# Allegro board CarteV1.brd
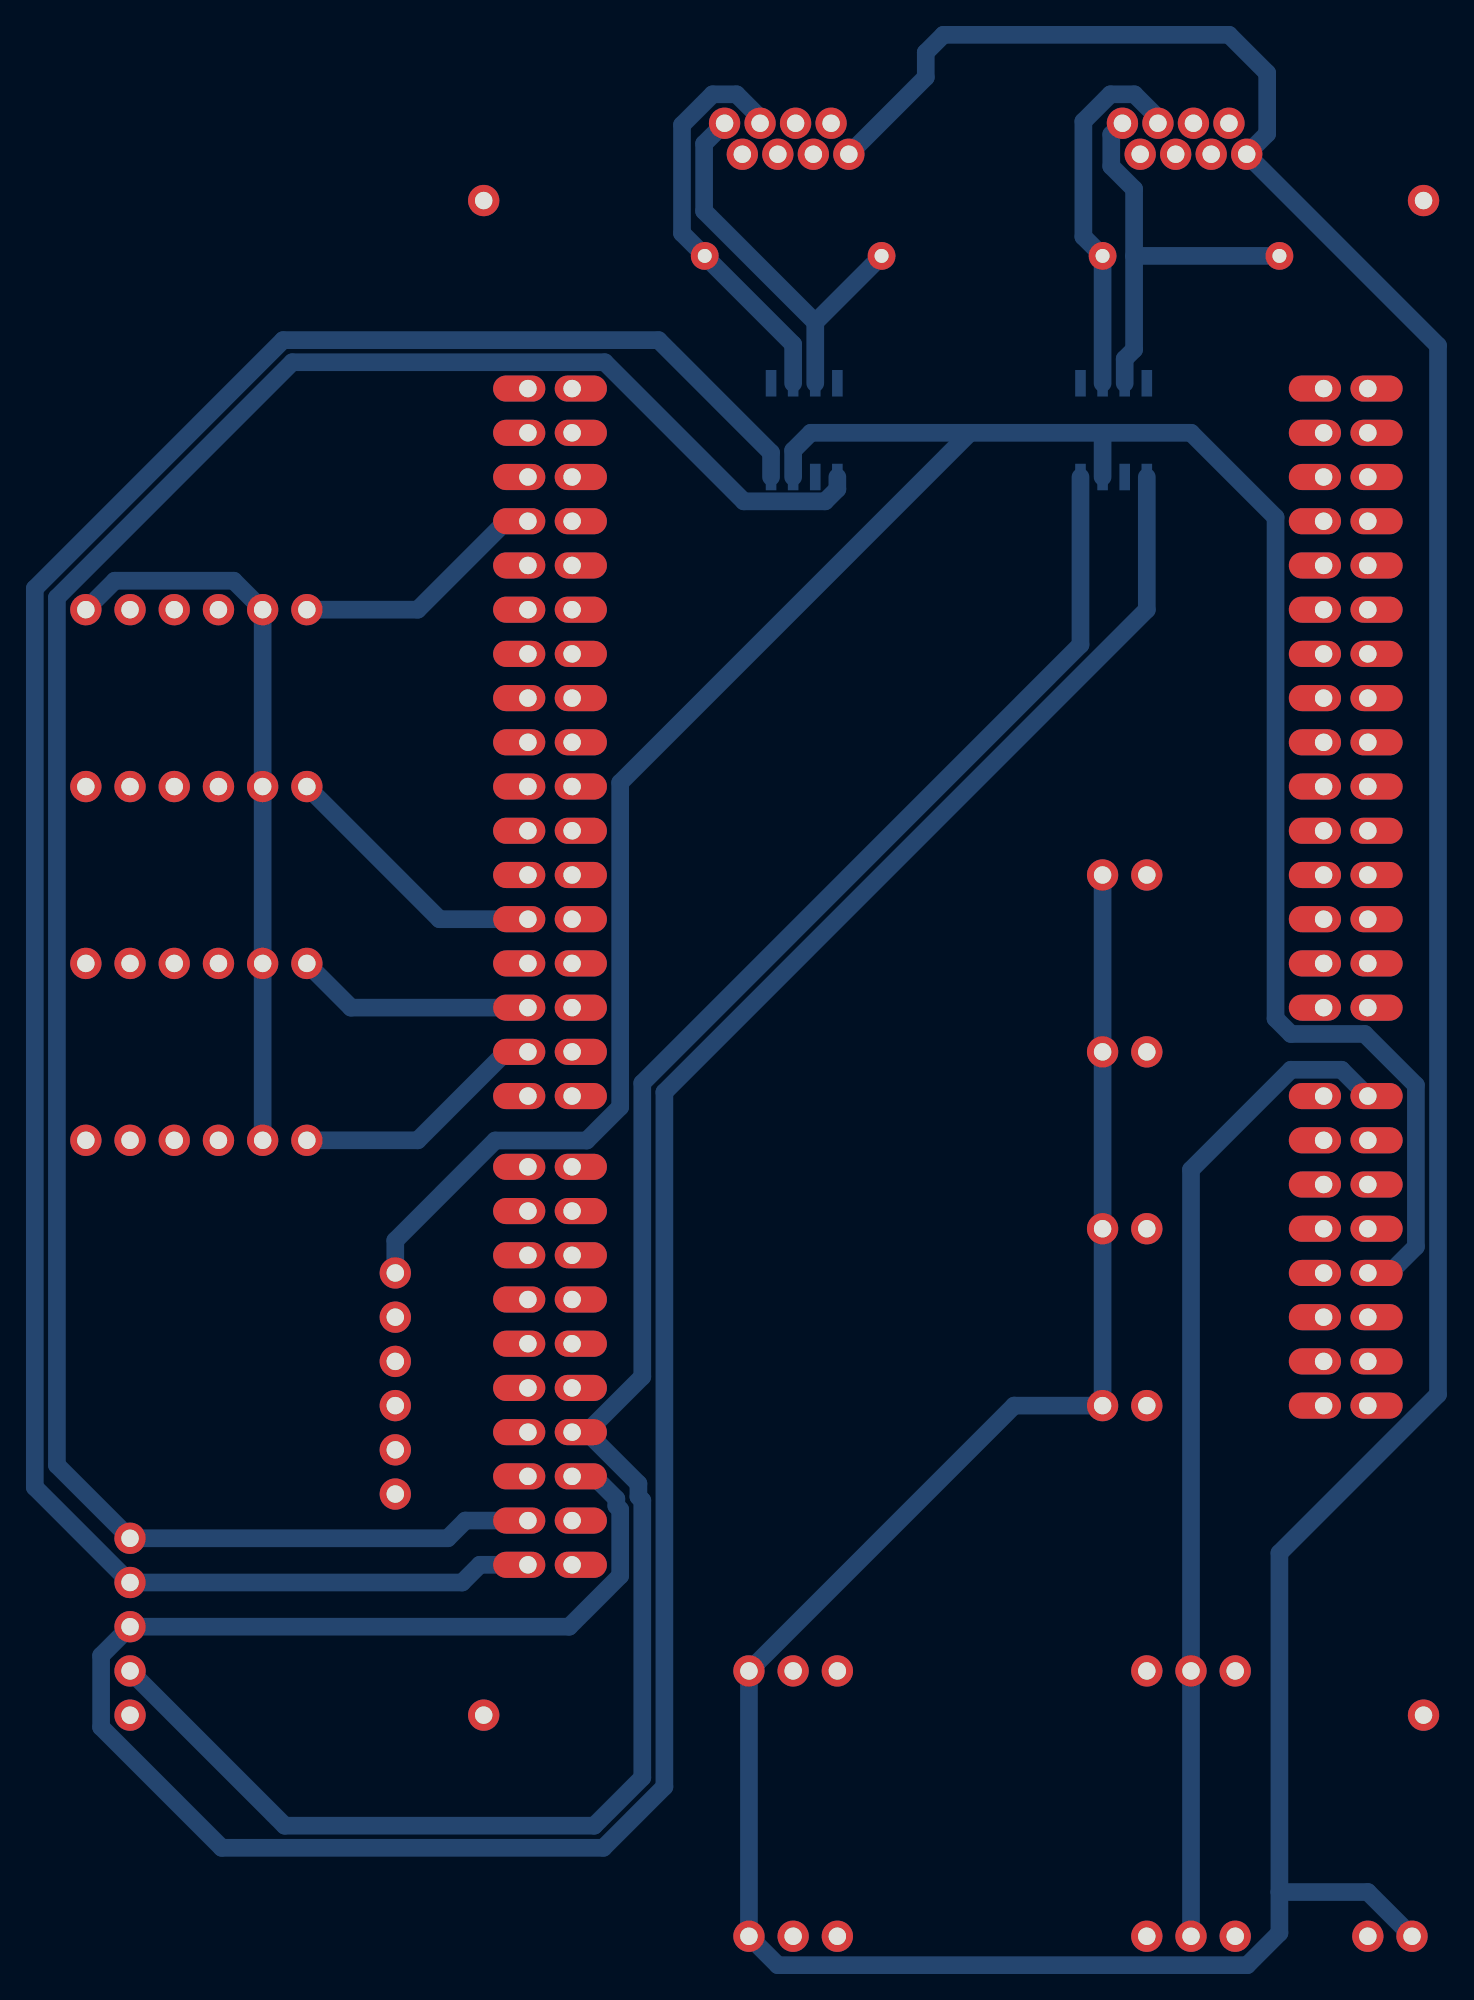
[diagram p0: board, top side]
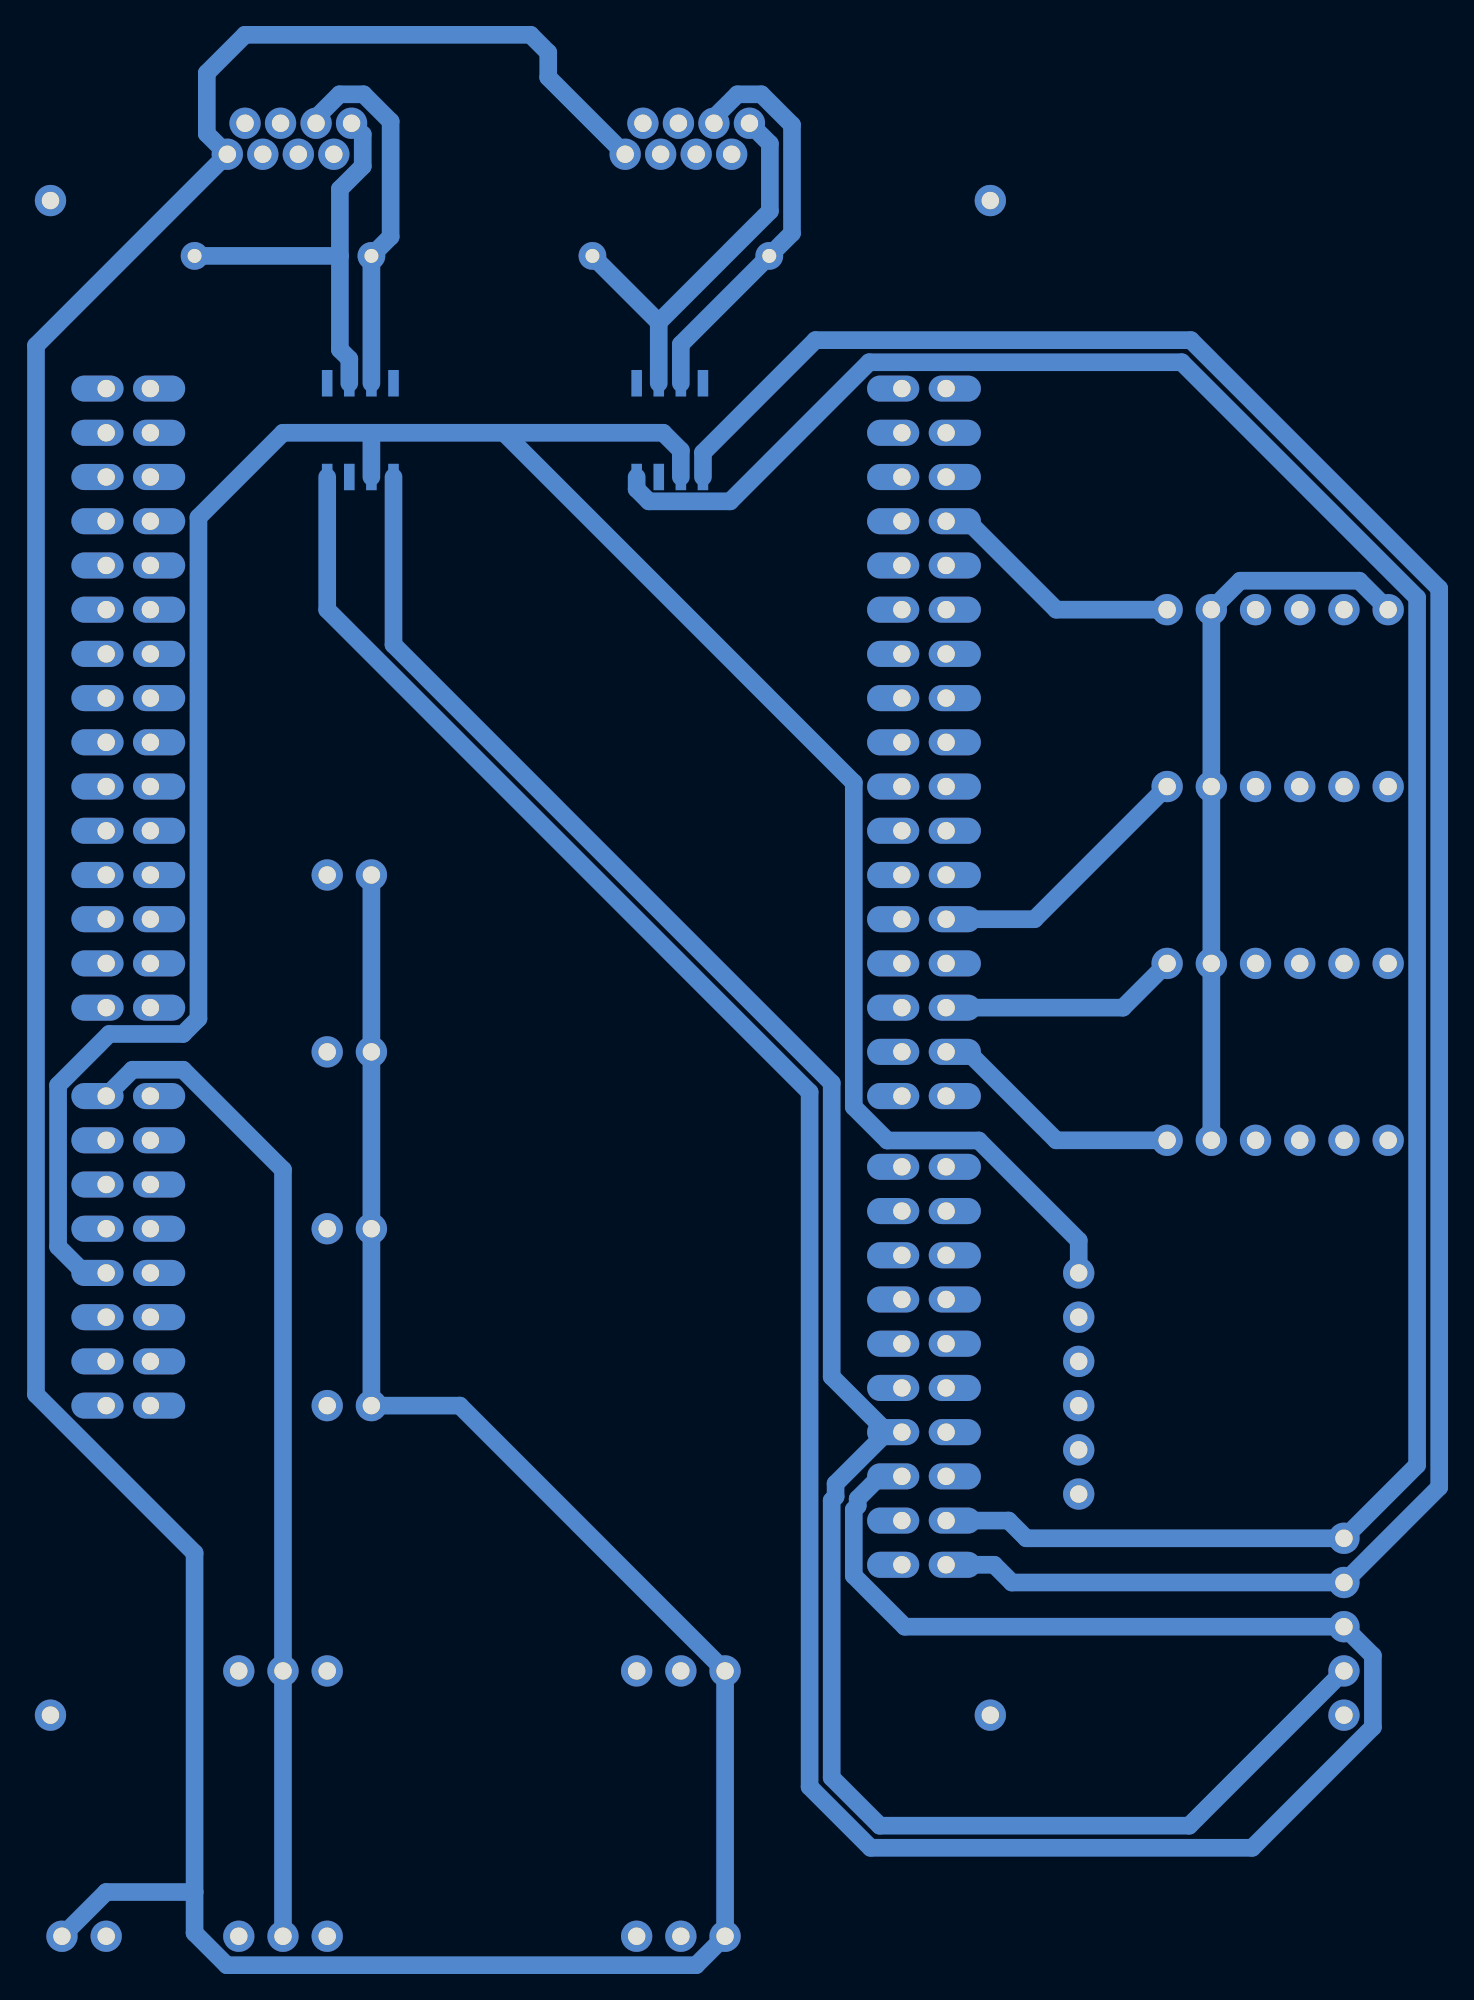
[diagram p1: board, bottom side, seen from below]

No outline. copper layers: TOP, BOTTOM. Coordinates in mm from the lowest, leftmost part position.

## Design rules (mm)
constraint set DEFAULT: min track width 1.016

## Placement (name value [footprint] x y rotation side)
J11  Sortie_1  [CONNECTEUR_2]  81.28 0 180 top
J12  Sortie_2  [CONNECTEUR_2]  48.26 30.48 0 top
J13  Sortie_3  [CONNECTEUR_2]  48.26 40.64 0 top
J14  Sortie_4  [CONNECTEUR_2]  48.26 60.96 0 top
J15  Entree_24V  [CONNECTEUR_2]  48.26 50.8 0 top
J17  Nappe_1  [CONNECTEUR_6]  15.24 45.72 180 top
J18  Nappe_2  [CONNECTEUR_6]  15.24 55.88 180 top
J19  Nappe_3  [CONNECTEUR_6]  15.24 66.04 180 top
J20  Nappe_4  [CONNECTEUR_6]  15.24 76.2 180 top
J23  Lect_Interm_RxTx  [CONNECTEUR_5]  0 7.62 90 top
J24  Potar  [CONNECTEUR_6]  15.24 20.32 90 top
R3  120  [RES_01]  33.02 96.52 0 top
R4  120  [RES_01]  55.88 96.52 0 top
U5  sn69hvd232d  [SN65HVD232D]  40.64 83.82 90 bottom
U6  sn69hvd232d  [SN65HVD232D]  58.42 83.82 90 bottom
U7  nucleo_144_shield  [NUCLEO_144_SHIELD]  71.12 88.9 180 top
U8  Conv_TEL_3-2411  [CONV_TRACO]  43.18 30.48 90 top
U9  RJ-45  [RJ45]  2.54 104.14 0 top
U10  RJ-45  [RJ45]  25.4 104.14 0 top
U11  Trou_Drivers  [TROU_DRIVERS]  20.32 12.7 90 top

## Library data of the parts
J11-J15 = CON2
J17-J20 J24 = CON6
J23 = CON5
R3 R4 = R
U5 U6 = sn69hvd232d
U7 = nucleo_144_shield
U8 = Conv_TEL_3-2411
U9 U10 = RJ-45
U11 = Trou_Drivers

## Footprints (pads in the part's own frame, mm; a bottom-side part is the same pattern mirrored in y, then rotated)
CONNECTEUR_2
  round 1.8 hole 1: 1(7.62,0) 2(10.16,0)
CONNECTEUR_5
  round 1.8 hole 1: 1(5.08,0) 2(7.62,0) 3(10.16,0) 4(12.7,0) 5(15.24,0)
CONNECTEUR_6
  round 1.8 hole 1: 1(5.08,0) 2(7.62,0) 3(10.16,0) 4(12.7,0) 5(15.24,0) 6(17.78,0)
CONV_TRACO
  round 1.8 hole 1: 1(-30.48,7.62) 2(-30.48,5.08) 3(-30.48,2.54) 4(-15.24,7.62) 5(-15.24,5.08) 6(-15.24,2.54) 7(-30.48,-15.24) 8(-30.48,-17.78) 9(-30.48,-20.32) 10(-15.24,-15.24) 11(-15.24,-17.78) 12(-15.24,-20.32)
NUCLEO_144_SHIELD
  oval 3x1.5 hole 1: 1(0,58.42) 2(2.54,58.42) 3(0,55.88) 4(2.54,55.88) 5(0,53.34) 6(2.54,53.34) 7(0,50.8) 8(2.54,50.8) 9(0,48.26) 10(2.54,48.26) 11(0,45.72) 12(2.54,45.72) 13(0,43.18) 14(2.54,43.18) 15(0,40.64) 16(2.54,40.64) 17(0,35.56) 18(2.54,35.56) 19(0,33.02) 20(2.54,33.02) 21(0,30.48) 22(2.54,30.48) 23(0,27.94) 24(2.54,27.94) 25(0,25.4) 26(2.54,25.4) 27(0,22.86) 28(2.54,22.86) 29(0,20.32) 30(2.54,20.32) 31(0,17.78) 32(2.54,17.78) 33(0,15.24) 34(2.54,15.24) 35(0,12.7) 36(2.54,12.7) 37(0,10.16) 38(2.54,10.16) 39(0,7.62) 40(2.54,7.62) 41(0,5.08) 42(2.54,5.08) 43(0,2.54) 44(2.54,2.54) 45(0,0) 46(2.54,0) 47(45.72,67.564) 48(48.26,67.564) 49(45.72,65.024) 50(48.26,65.024) 51(45.72,62.484) 52(48.26,62.484) 53(45.72,59.944) 54(48.26,59.944) 55(45.72,57.404) 56(48.26,57.404) 57(45.72,54.864) 58(48.26,54.864) 59(45.72,52.324) 60(48.26,52.324) 61(45.72,49.784) 62(48.26,49.784) 63(45.72,47.244) 64(48.26,47.244) 65(45.72,44.704) 66(48.26,44.704) 67(45.72,40.64) 68(48.26,40.64) 69(45.72,38.1) 70(48.26,38.1) 71(45.72,35.56) 72(48.26,35.56) 73(45.72,33.02) 74(48.26,33.02) 75(45.72,30.48) 76(48.26,30.48) 77(45.72,27.94) 78(48.26,27.94) 79(45.72,25.4) 80(48.26,25.4) 81(45.72,22.86) 82(48.26,22.86) 83(45.72,20.32) 84(48.26,20.32) 85(45.72,17.78) 86(48.26,17.78) 87(45.72,15.24) 88(48.26,15.24) 89(45.72,12.7) 90(48.26,12.7) 91(45.72,10.16) 92(48.26,10.16) 93(45.72,7.62) 94(48.26,7.62) 95(45.72,5.08) 96(48.26,5.08) 97(45.72,2.54) 98(48.26,2.54) 99(45.72,0) 100(48.26,0)
RES_01
  round 1.6 hole 0.8: 1(0,0) 2(10.16,0)
RJ45
  round 1.8 hole 1: 1(31.62,0) 2(33.66,0) 3(35.7,0) 4(37.74,0) 5(32.64,-1.78) 6(34.68,-1.78) 7(36.72,-1.78) 8(38.76,-1.78)
SN65HVD232D
  rect 1.524x0.61 smd: 1(0,0) 2(0,-1.27) 3(0,-2.54) 4(0,-3.81) 5(5.385,-3.81) 6(5.385,-2.54) 7(5.385,-1.27) 8(5.385,0)
TROU_DRIVERS
  round 1.8 hole 1: 1(0,0) 2(87,0) 3(0,-54) 4(87,-54)

## Nets
24V_ALIM: J11.1 J12.1 J13.1 J14.1 J15.1 U8.1 U8.4 U9.8(PIN_8) U10.8(PIN_8)
+3V3: J24.6 U5.3(VCC) U6.3(VCC) U7.7
+5V: U7.9
VIN_5V: U7.15 U8.8 U8.11
0: J11.2 J12.2 J13.2 J14.2 J15.2 J17.5 J18.5 J19.5 J20.5 J23.1 J24.1 U5.2 U6.2 U7.11 U8.9 U8.12 U9.3 U10.3
CAN1_H: R3.2 U5.7 U9.1
CAN1_L: R3.1 U5.6 U9.2
CAN1RX_PB8: J23.4 U5.4 U7.48
CAN1TX_PB9: J23.5 U5.1 U7.50
CAN2_H: R4.2 U6.7 U10.1
CAN2_L: R4.1 U6.6 U10.2
CAN2RX_PB12: J23.2 U6.4 U7.53
CAN2TX_PB13: J23.3 U6.1 U7.51
CH1_PE9: J17.1 U7.70(PE9)
CH2_PE11: J18.1 U7.72
CH3_PE13: J19.1 U7.76
CH4_PE14: J20.1 U7.94
PA4: J24.5 U7.63
PA5: J24.2 U7.56
PA6: J24.3 U7.58
PA7: J24.4 U7.60
N37105: J17.2 J18.2 J19.2 J20.2 J20.6

Pads without a net: J17 3 4 6; J18 3 4 6; J19 3 4 6; J20 3 4; U5 5 8; U6 5 8; U7 1 2 3 4 5 6 8 10 12 13 14 16 17 18 19 20 21 22 23 24 25 26 27 28 29 30 31 32 33 34 35 36 37 38 39 40 41 42 43 44 45 46 47 49 52 54 55 57 59 61 62 64 65 66 67 68 69 71 73 74 75 77 78 79 80 81 82 83 84 85 86 87 88 89 90 91 92 93 95 96 97 98 99 100; U8 2 3 5 6 7 10; U9 4 5 6 7; U10 4 5 6 7; U11 1 2 3 4

## Routing (per net, layer and track width the routed paths; a pad name or vN(x,y) marks a point on that pad's centre or on a via; arc(x,y) is an arc through that point)
24V_ALIM: length 257.2
  BOTTOM w1.016: 66.04,2.54 66.04,0.19 64.19,-1.66 37.22,-1.66 U8.1 U8.4 50.8,30.48 J12.1 J13.1 J15.1 J14.1 ; 66.04,2.54 66.04,22.01 75.15,31.12 75.15,91.37 U10.8 65.34,103.54 65.34,107.03 63.14,109.22 46.74,109.22 45.72,108.2 45.72,106.78 U9.8 ; 66.04,2.54 71.12,2.54 J11.1
+3V3: length 150.3
  BOTTOM w1.016: 48.26,86.36 55.88,86.36 ; 48.26,86.36 28.16,66.26 28.16,47.63 26.24,45.71 20.98,45.71 15.24,39.96 J24.6 ; 48.26,86.36 39.12,86.36 38.1,85.34 U5.3 ; 55.88,86.36 U6.3 ; 55.88,86.36 60.96,86.36 65.82,81.5 65.82,52.71 66.7,51.83 70.94,51.83 73.88,48.89 73.88,39.61 72.37,38.1 U7.7
VIN_5V: length 57.2
  BOTTOM w1.016: U8.8 U8.11 60.96,44.03 66.7,49.77 69.61,49.77 U7.15
CAN1_H: length 23.5
  BOTTOM w1.016: U9.1 32.98,102.96 32.98,99.1 39.37,92.71 ; 39.37,92.71 R3.2 ; 39.37,92.71 U5.7
CAN1_L: length 23.6
  BOTTOM w1.016: U5.6 38.1,91.44 R3.1 31.71,97.83 31.71,104.05 33.47,105.8 34.85,105.8 36.2,104.45 U9.2
CAN1RX_PB8: length 134.9
  BOTTOM w1.016: U7.48 20.1,21.34 19.08,20.32 J23.4 -5.47,25.79 -5.47,77.41 8.8,91.68 30.36,91.68 36.83,85.22 U5.4
CAN1TX_PB9: length 133.8
  BOTTOM w1.016: U5.1 40.64,83.13 39.94,82.42 35.27,82.42 27.28,90.41 9.32,90.41 -4.2,76.89 -4.2,27.06 J23.5 18.25,22.86 19.27,23.88 U7.50
CAN2_H: length 24.3
  BOTTOM w1.016: 57.69,96.52 57.69,100.36 56.38,101.67 56.38,103.5 U10.1 ; 57.69,96.52 R4.2 ; 57.69,96.52 57.69,91.14 57.15,90.6 U6.7
CAN2_L: length 21.3
  BOTTOM w1.016: U6.6 R4.1 54.78,97.62 54.78,104.25 56.33,105.8 57.71,105.8 59.06,104.45 U10.2
CAN2RX_PB12: length 122.9
  BOTTOM w1.016: J23.2 8.89,6.35 26.67,6.35 29.43,9.11 29.43,25.03 29.21,25.25 29.21,25.99 26.25,28.96 ; 26.25,28.96 29.43,32.14 29.43,49.01 54.61,74.19 U6.4 ; 26.25,28.96 U7.53
CAN2TX_PB13: length 166.8
  BOTTOM w1.016: U7.51 26.65,26.42 27.94,25.13 27.94,24.72 28.16,24.5 28.16,20.71 25.23,17.78 J23.3 -1.66,16.12 -1.66,12.01 5.27,5.08 27.2,5.08 30.7,8.59 30.7,48.48 58.42,76.2 U6.1
CH1_PE9: length 14.8
  BOTTOM w1.016: J17.1 16.53,45.72 21.61,50.8 U7.70
CH2_PE11: length 13.8
  BOTTOM w1.016: U7.72 12.7,53.34 J18.1
CH3_PE13: length 15.9
  BOTTOM w1.016: J19.1 17.78,58.42 U7.76
CH4_PE14: length 14.8
  BOTTOM w1.016: J20.1 16.53,76.2 21.61,81.28 U7.94
N37105: length 42
  BOTTOM w1.016: J17.2 J18.2 J19.2 J20.2 5.96,77.86 -0.88,77.86 J20.6
